# EAGLE board Chassis Board V2 (EAGLE 9.1.3)
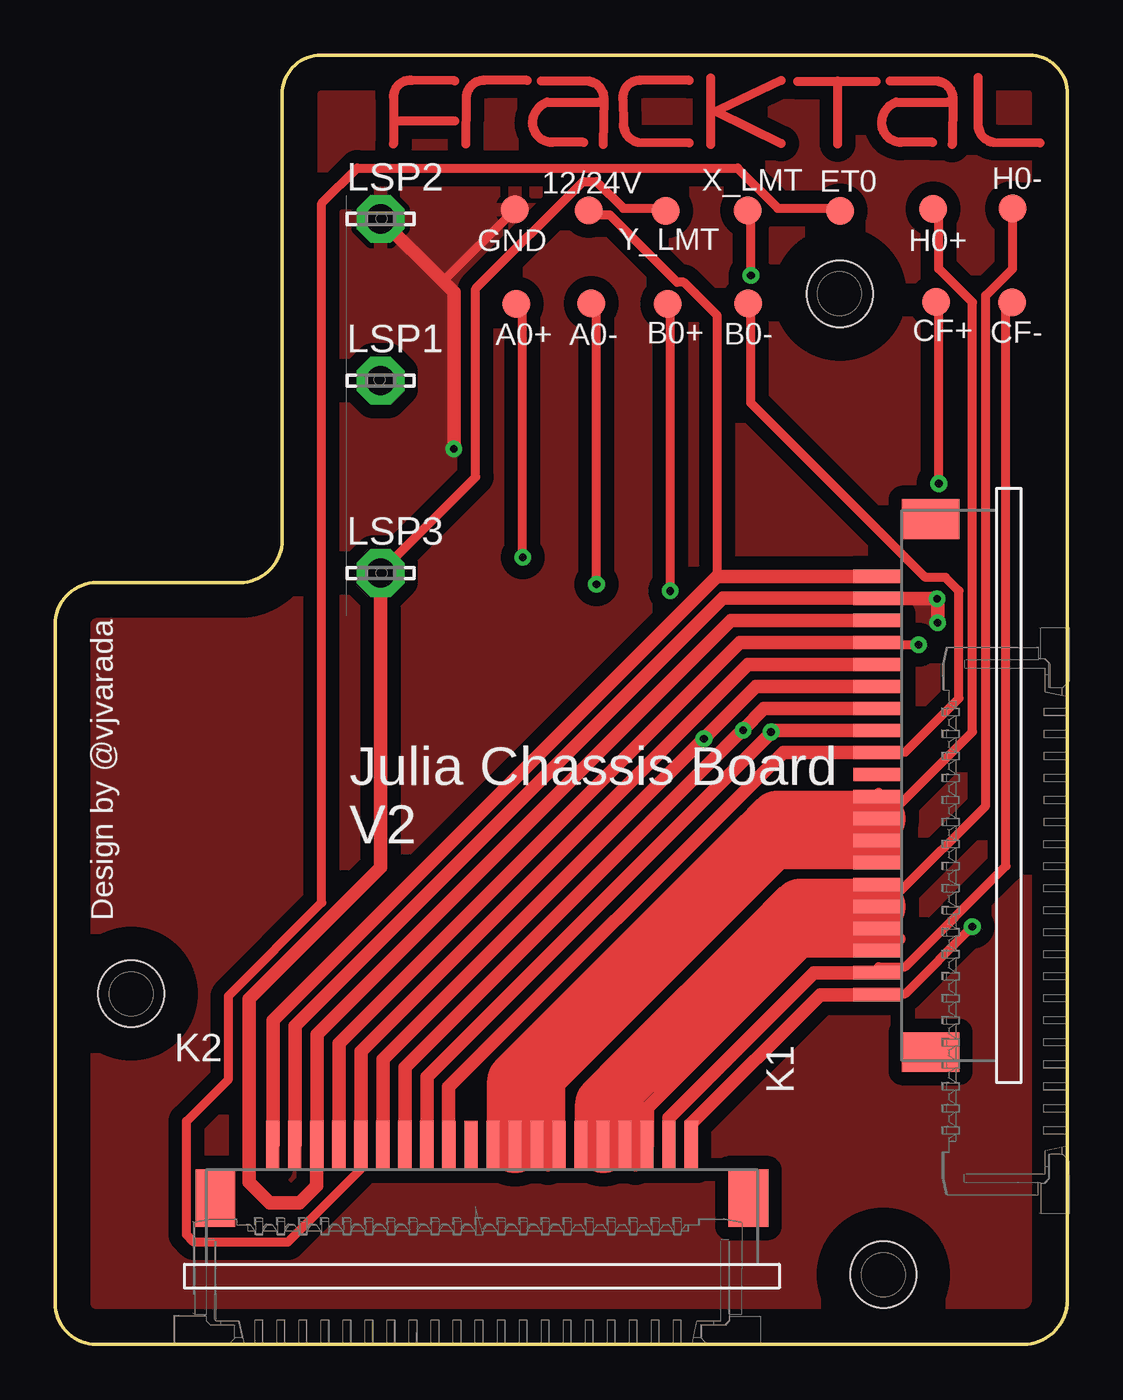
[diagram p0: board, top side]
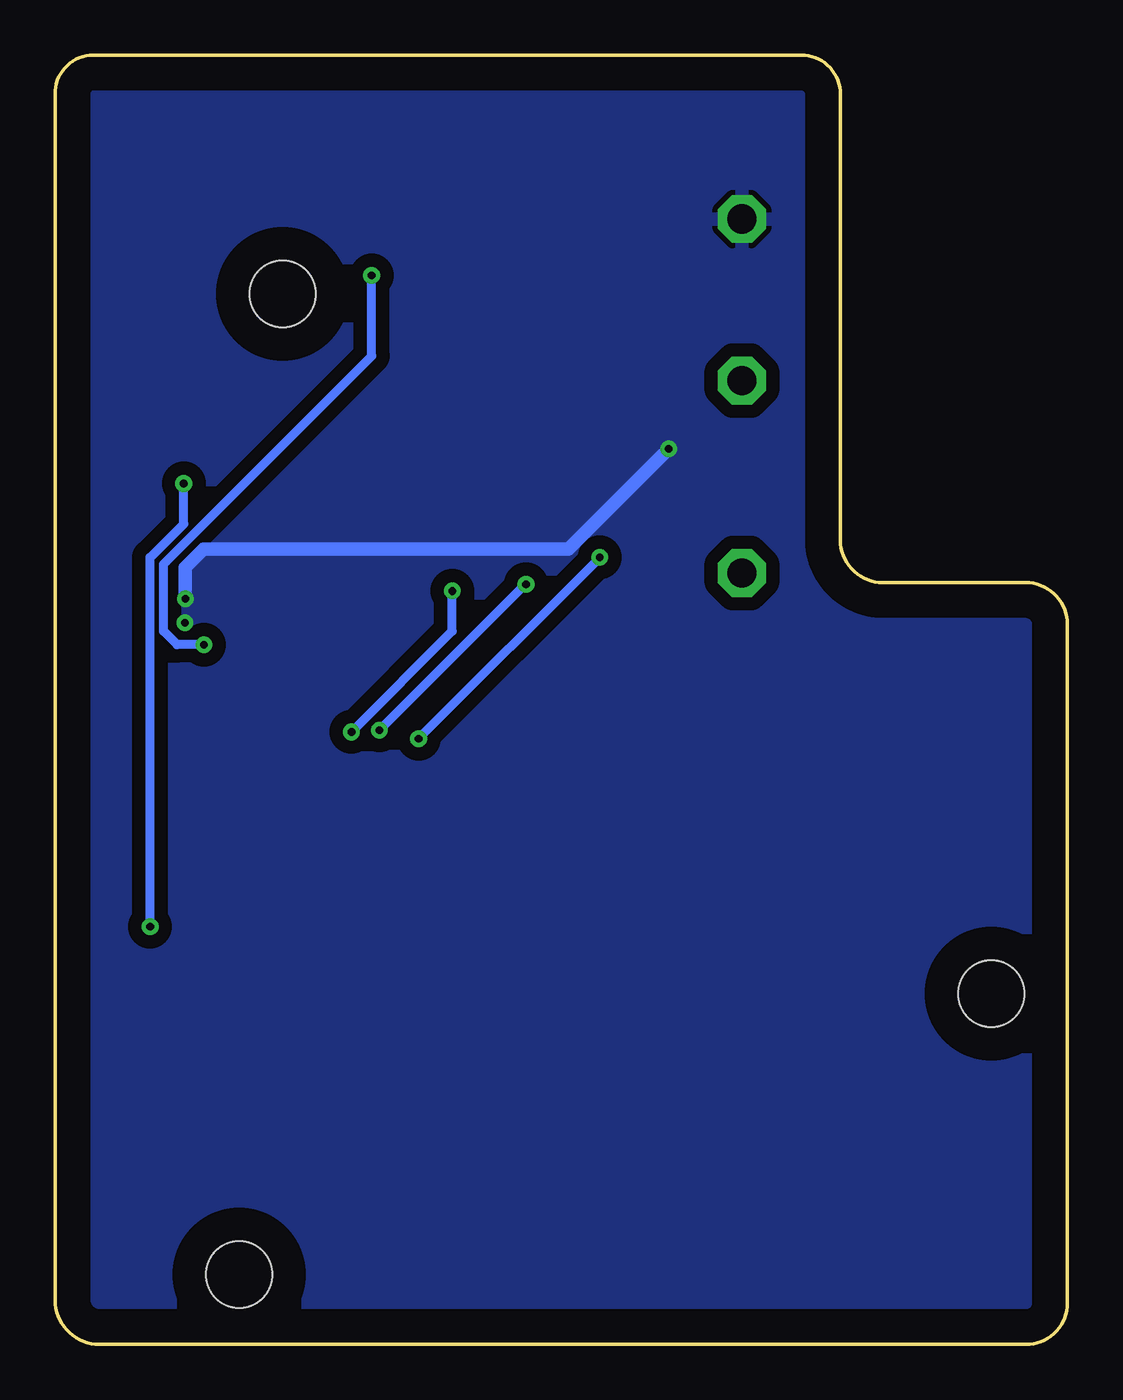
[diagram p1: board, bottom side, seen from below]

Size 45.97 x 58.55 mm. Coordinates in mm from the lower left corner, seen from the top.
Outline: 45.97,53.54 45.97,2.01 arc-90 43.97,0 1.88,0 arc-90 0,1.88 0,32.69 arc-90 1.91,34.6 8.38,34.6 arc90 10.31,36.53 10.31,56.77 arc-90 12.09,58.55 44.25,58.55 arc-90 45.97,56.77 45.97,53.54
Copper layers (1*16): Top 0.035mm / dielectric 1.5mm / Bottom 0.035mm
Design rules "LionCircuits *": minimum track width 8mil, minimum drill 0.35mm, track to track 8mil, track to pad 8mil, pad to pad 8mil, via to via 8mil, smd to smd 8mil, copper to edge 60mil, drill to drill 10mil, minimum pad ring 10mil, minimum via ring 8mil, stop-mask expansion 4mil, vias tented up to drill 0mil, thermal gap 10mil
Net classes: 0 default: width 0.406 mm
Holes 3 mm at 35.64,47.7 3.45,15.93 37.62,3.18

## Footprints (pad centres in the part's own frame; a part is rotated, then mirrored left to right if it is on the bottom)
68612014122 = smd 0.6 x 2.2: 1 -9.42,1.1; 2 -8.42,1.1; 3 -7.42,1.1; 4 -6.42,1.1; 5 -5.42,1.1; 6 -4.42,1.1; 7 -3.42,1.1; 8 -2.42,1.1; 9 -1.42,1.1; 10 -0.42,1.1; 11 0.58,1.1; 12 1.58,1.1; 13 2.58,1.1; 14 3.58,1.1; 15 4.58,1.1; 16 5.58,1.1; 17 6.58,1.1; 18 7.58,1.1; 19 8.58,1.1; 20 9.58,1.1 | smd 1.8 x 2.6: Z1 -12.02,-1.3; Z2 12.18,-1.3
LSP13 = drill 1.321 pad 2.159 octagon: MP 0,0
PAD.03X.05 = smd 1.27 x 1.27: P$1 0,0

## Placement (x,y rotation side)
FRAME1  FRAME-LETTER  [CREATIVE_COMMONS]  21.84,-13.64 0 top  (outside the outline)
K1  68612014122  [68612014122]  38.46,25.3 90 top
K2  68612014122  [68612014122]  19.3,7.95 0 top
LSP1  NO  [LSP13]  14.78,43.76 0 top
LSP2  NC  [LSP13]  14.78,51.1 0 top
LSP3  C  [LSP13]  14.78,35.03 0 top
TP1  TEST-POINT3X5  [PAD.03X.05]  20.88,51.54 0 top
TP2  TEST-POINT3X5  [PAD.03X.05]  24.23,51.49 0 top
TP3  TEST-POINT3X5  [PAD.03X.05]  27.74,51.46 0 top
TP4  TEST-POINT3X5  [PAD.03X.05]  31.45,51.49 0 top
TP5  TEST-POINT3X5  [PAD.03X.05]  35.66,51.46 0 top
TP6  TEST-POINT3X5  [PAD.03X.05]  20.96,47.24 0 top
TP7  TEST-POINT3X5  [PAD.03X.05]  24.36,47.27 0 top
TP8  TEST-POINT3X5  [PAD.03X.05]  27.81,47.24 0 top
TP9  TEST-POINT3X5  [PAD.03X.05]  31.47,47.27 0 top
TP10  TEST-POINT3X5  [PAD.03X.05]  39.88,51.56 0 top
TP11  TEST-POINT3X5  [PAD.03X.05]  43.48,51.59 0 top
TP12  TEST-POINT3X5  [PAD.03X.05]  43.46,47.32 0 top
TP13  TEST-POINT3X5  [PAD.03X.05]  40,47.35 0 top
U$1  [FRACKTALLOGO]  27.36,54.41 0 top

## Library data of the parts
FRAME1 = SparkFun-Aesthetics
K1 K2 = Wurth_Elektronik_Electromechanic_FPC_Connectors_&_Flat_Flexible_Cable_rev15b
LSP1-LSP3 = solpad
TP1-TP13 = SparkFun-Connectors
U$1 = FracktalWorks_Eagle_Library

## Nets
12V: K1.20 K2.1 TP2.P$1
A0+: K1.15 K2.6 TP6.P$1
A0-: K1.14 K2.7 TP7.P$1
B0+: K1.13 K2.8 TP8.P$1
B0-: K1.12 K2.9 TP9.P$1
CF+: K1.1 K2.20 TP13.P$1
CF-: K1.2 K2.19 TP12.P$1
ET0: K1.16 K2.5 TP5.P$1
GND: K1.19 K2.2 LSP2.MP TP1.P$1
H0+: K1.7 K1.8 K1.9 K1.10 K2.11 K2.12 K2.13 K2.14 TP10.P$1
H0-: K1.3 K1.4 K1.5 K1.6 K2.15 K2.16 K2.17 K2.18 TP11.P$1
X_LMT: K1.17 K2.4 TP4.P$1
Y_LMT: K1.18 K2.3 LSP3.MP TP3.P$1

## Tracks (layer width: path | path; a pad name or v marks a point on that pad's centre or on a via)
12V
  Top 0.406: TP2.P$1 24.28,51.28 25.2,51.28 28.25,48.23 28.55,48.23 30.07,46.71 30.07,35.13 30.06,34.88
  Top 0.61: K2.1 9.89,14.72 30.06,34.88 K1.20
A0+  (via drill 0.35)
  Top 0.406: v21.23,35.74 21.23,47.02 TP6.P$1 | v29.46,27.51 v29.46,27.52
  Top 0.61: K2.6 14.89,12.96 v29.46,27.52 31.82,29.88 K1.15
  Bottom 0.406: v29.46,27.51 v21.23,35.74
A0-  (via drill 0.35)
  Top 0.406: v24.59,34.52 24.59,47.02 TP7.P$1 | v31.24,27.89 31.23,27.91
  Top 0.61: K2.7 15.89,12.57 31.21,27.89 31.23,27.91 32.2,28.88 K1.14
  Bottom 0.406: v31.24,27.89 24.61,34.52 v24.59,34.52
B0+  (via drill 0.35)
  Top 0.406: v27.94,34.21 27.94,47.02 TP8.P$1 | v32.51,27.81 32.54,27.79
  Top 0.61: K2.8 16.89,12.14 32.54,27.79 32.63,27.88 K1.13
  Bottom 0.406: v27.94,34.21 27.94,32.39 v32.51,27.81
B0-
  Top 0.406: TP9.P$1 31.6,47.02 31.6,42.75 39.52,34.82 40.44,34.82 41.05,34.21 41.05,29.34 38.61,26.9 37.39,26.9 K1.12
  Top 0.61: K1.12 33.06,26.88 17.87,11.69 K2.9
CF+  (via drill 0.35)
  Top 0.406: v40.13,39.09 40.13,47.32 TP13.P$1 | v41.66,18.97 38.61,15.93 37.39,15.93 K1.1
  Top 0.61: K1.1 34.75,15.88 28.88,10.02 K2.20
  Bottom 0.406: v40.13,39.09 40.13,37.26 41.66,35.74 v41.66,18.97
CF-
  Top 0.406: TP12.P$1 43.18,47.32 43.18,21.72 38.61,17.15 37.39,17.15 K1.2
  Top 0.61: K1.2 34.47,16.88 27.87,10.28 K2.19
ET0
  Top 0.406: TP5.P$1 35.56,51.59 32.82,51.59 30.99,53.42 13.72,53.42 12.12,51.82 12.12,20.07 7.87,15.82 7.87,12.04 5.97,10.13 5.97,4.98 6.3,4.65 10.57,4.65 13.89,7.98 K2.5
  Top 0.61: K2.5 13.89,13.31 31.46,30.88 K1.16
GND  (via drill 0.35)
  Top 0.406: TP1.P$1 17.62,48.27 17.58,48.23
  Top 0.61: K2.2 10.89,14.46 30.33,33.89 37.34,33.89 K1.19 37.38,33.86 v40.06,33.86 40.08,33.83 v40.08,32.77 | LSP2.MP 17.62,48.27 18.11,47.78 v18.11,40.67
  Bottom 0.61: v18.11,40.67 22.66,36.12 39.22,36.12 40.06,35.28 v40.06,33.86
  pour Top (isolate 0.61): 12.07,58.6 43.89,58.6 arc-90 46.08,56.41 46.08,2.77 arc-90 43.13,-0.18 2.18,-0.18 arc-90 -0.08,2.08 -0.08,32.36 arc-90 2.18,34.62 8.33,34.62 arc90 10.67,36.96 10.67,57.1 arc-90 12.22,58.65
  pour Bottom (isolate 0.61): 11.51,58.6 43.69,58.6 arc-90 46.2,56.08 46.2,2.18 arc-90 43.61,-0.41 2.24,-0.41 arc-90 0,1.83 0,31.6 arc-90 3.15,34.75 8.08,34.75 arc90 10.87,37.54 10.87,57.89 arc-90 11.61,58.62
H0+
  Top 0.406: TP10.P$1 40.13,51.28 40.13,48.84 41.66,47.32 41.66,27.81 38.3,24.46 K1.9 37.39,25.07 K1.10 | K2.13 22.15,8.92 K2.12
  Top 0.61: 22.87,11.76 K2.14 | 22.87,11.76 32.99,21.88 K1.7 | 31.91,23 32.51,22.4 37.83,22.4 | 38.2,22.4 37.83,22.4 | 37.83,22.4 K1.8 | 22.87,11.76 22.38,11.26 22.38,8.15 21.88,8.65 K2.13 | K2.12 K2.11
  Top 2.54: K1.9 32.79,23.88 31.91,23 20.89,11.98 K2.12
H0-
  Top 0.406: TP11.P$1 43.48,48.84 42.27,47.63 42.27,24.46 38.3,20.5 K1.5
  Top 0.61: 26.43,12.48 26.43,8.22 26.36,8.15 | 26.36,8.15 25.88,8.63 K2.17 | K2.16 K2.15 | 26.36,8.15 26.36,8.53 K2.18 26.9,9.06 26.9,10.74 34.03,17.88 K1.3 K1.4 | 32.28,18.32 38.23,18.32 38.33,18.42 37.36,19.39 K1.5 K1.6
  Top 2.54: K1.5 33.83,19.88 32.28,18.32 26.43,12.48 24.88,10.93 K2.16
X_LMT  (via drill 0.35)
  Top 0.406: v31.6,48.54 31.6,51.28 TP4.P$1 | v39.22,31.78 37.39,31.78 K1.17
  Top 0.61: K1.17 31.09,31.87 12.89,13.67 K2.4
  Bottom 0.406: v31.6,48.54 31.6,44.88 41.05,35.43 41.05,32.39 40.44,31.78 v39.22,31.78
Y_LMT
  Top 0.406: TP3.P$1 27.64,51.59 25.81,51.59 24.59,52.81 23.98,52.81 19.1,47.93 19.1,39.4 14.83,35.13 LSP3.MP
  Top 0.61: K1.18 30.7,32.88 11.89,14.08 K2.3 11.88,7.21 11.1,6.43 9.75,6.43 8.81,7.37 8.81,15.7 14.78,21.67 LSP3.MP

## Text on the board
tNames: 12/24V | X_LMT | ET0 | H0- | GND | Y_LMT | H0+ | CF+ | A0+ | A0- | B0+ | B0- | CF- | Julia Chassis Board / V2 | Design by @vjvarada